# EAGLE board gd_hs (EAGLE 7.2.0)
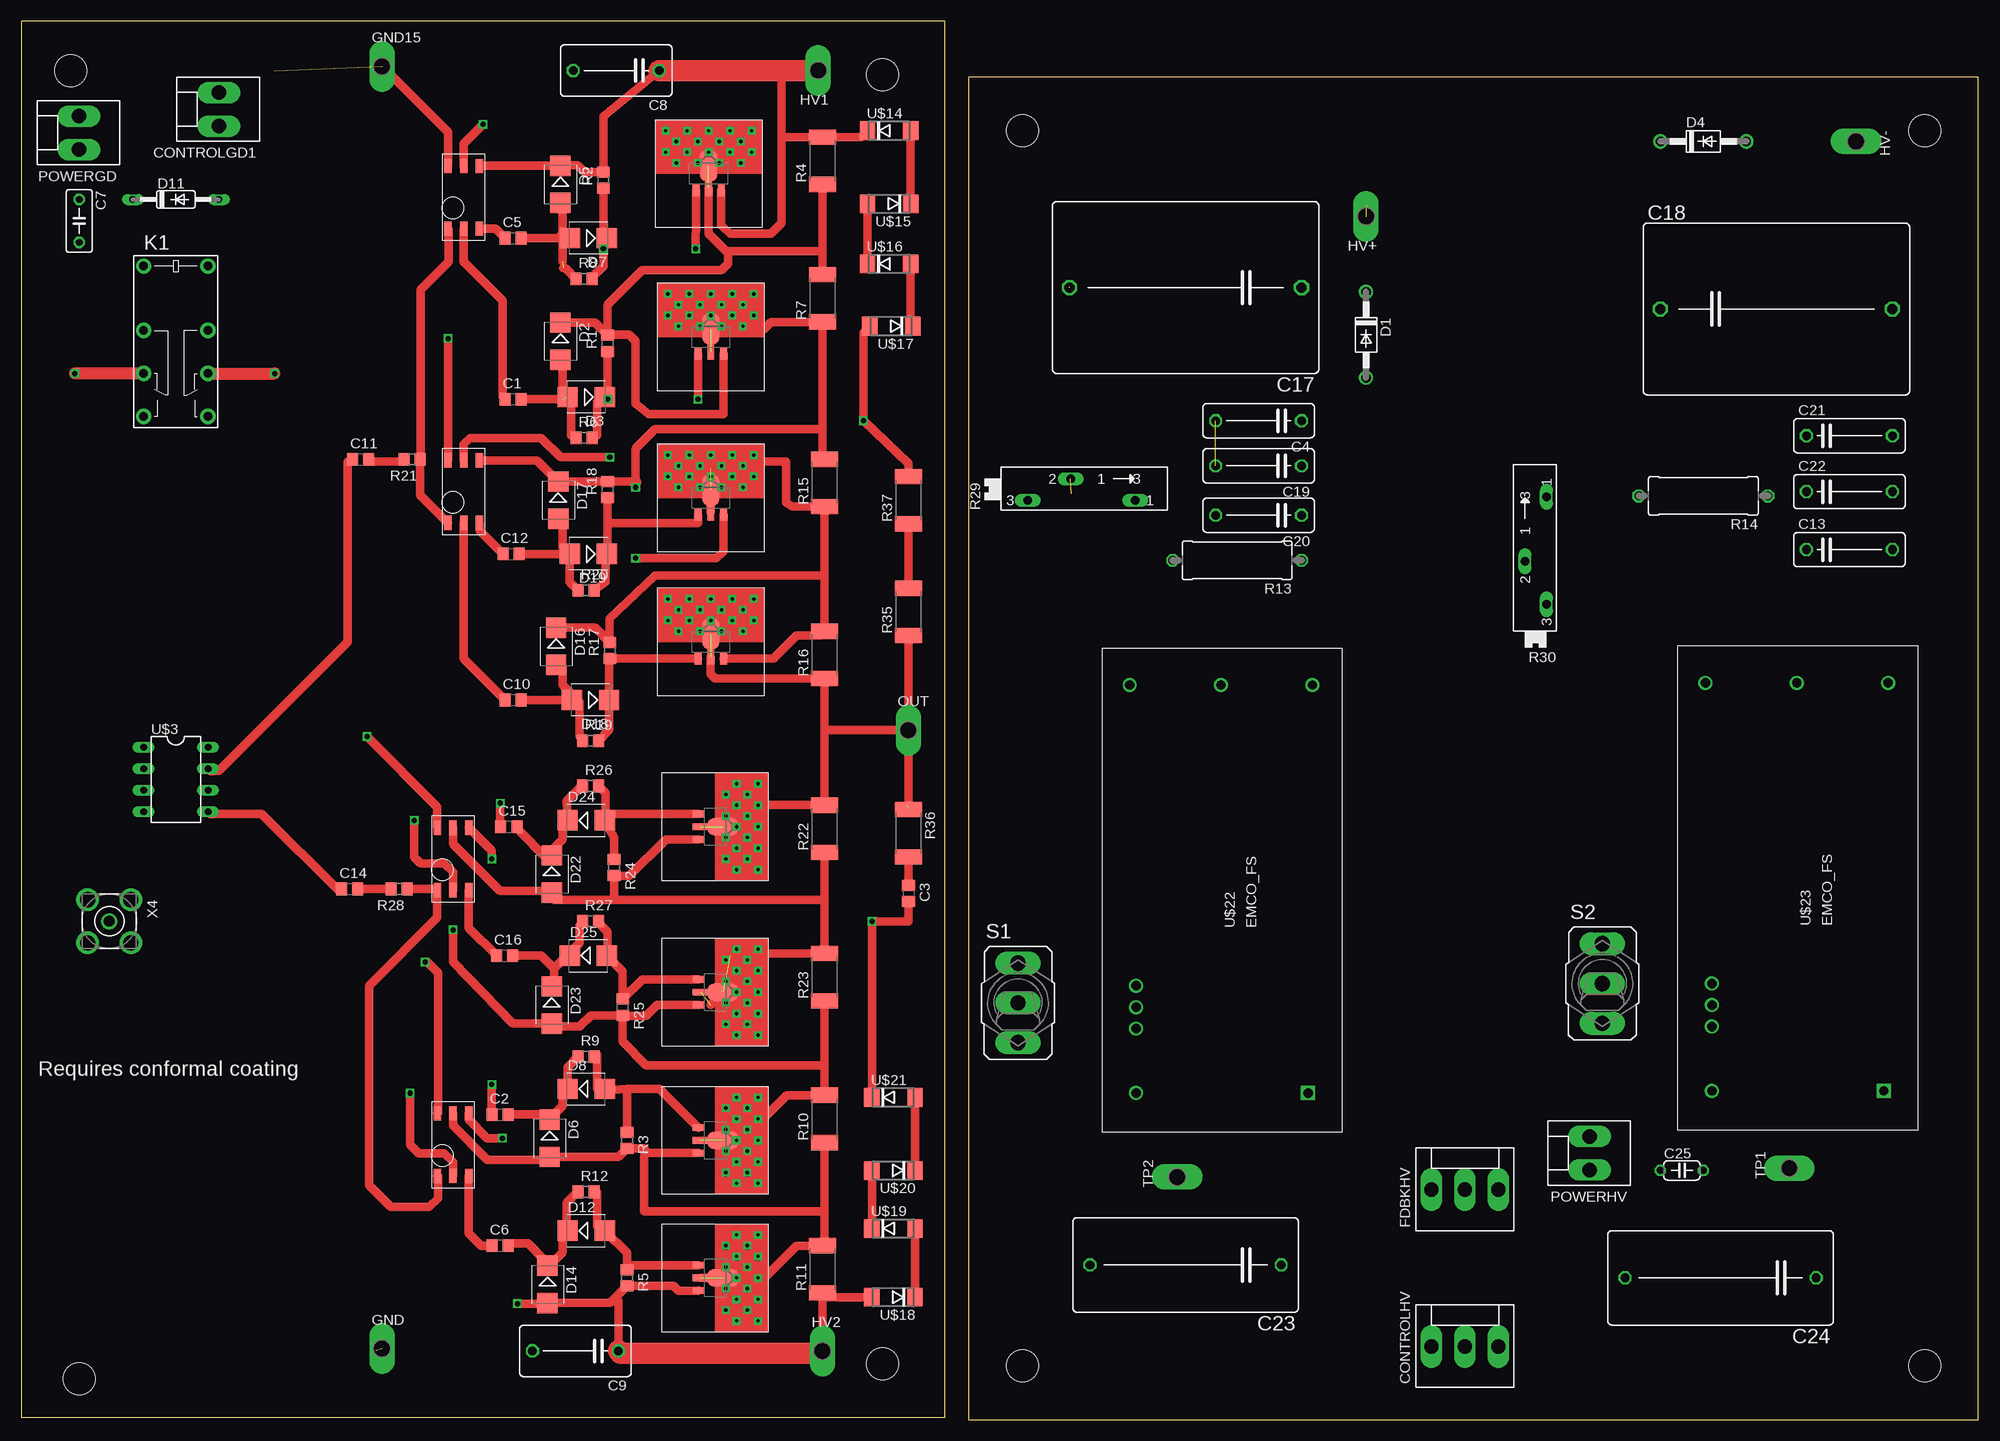
[diagram p0: board, top side]
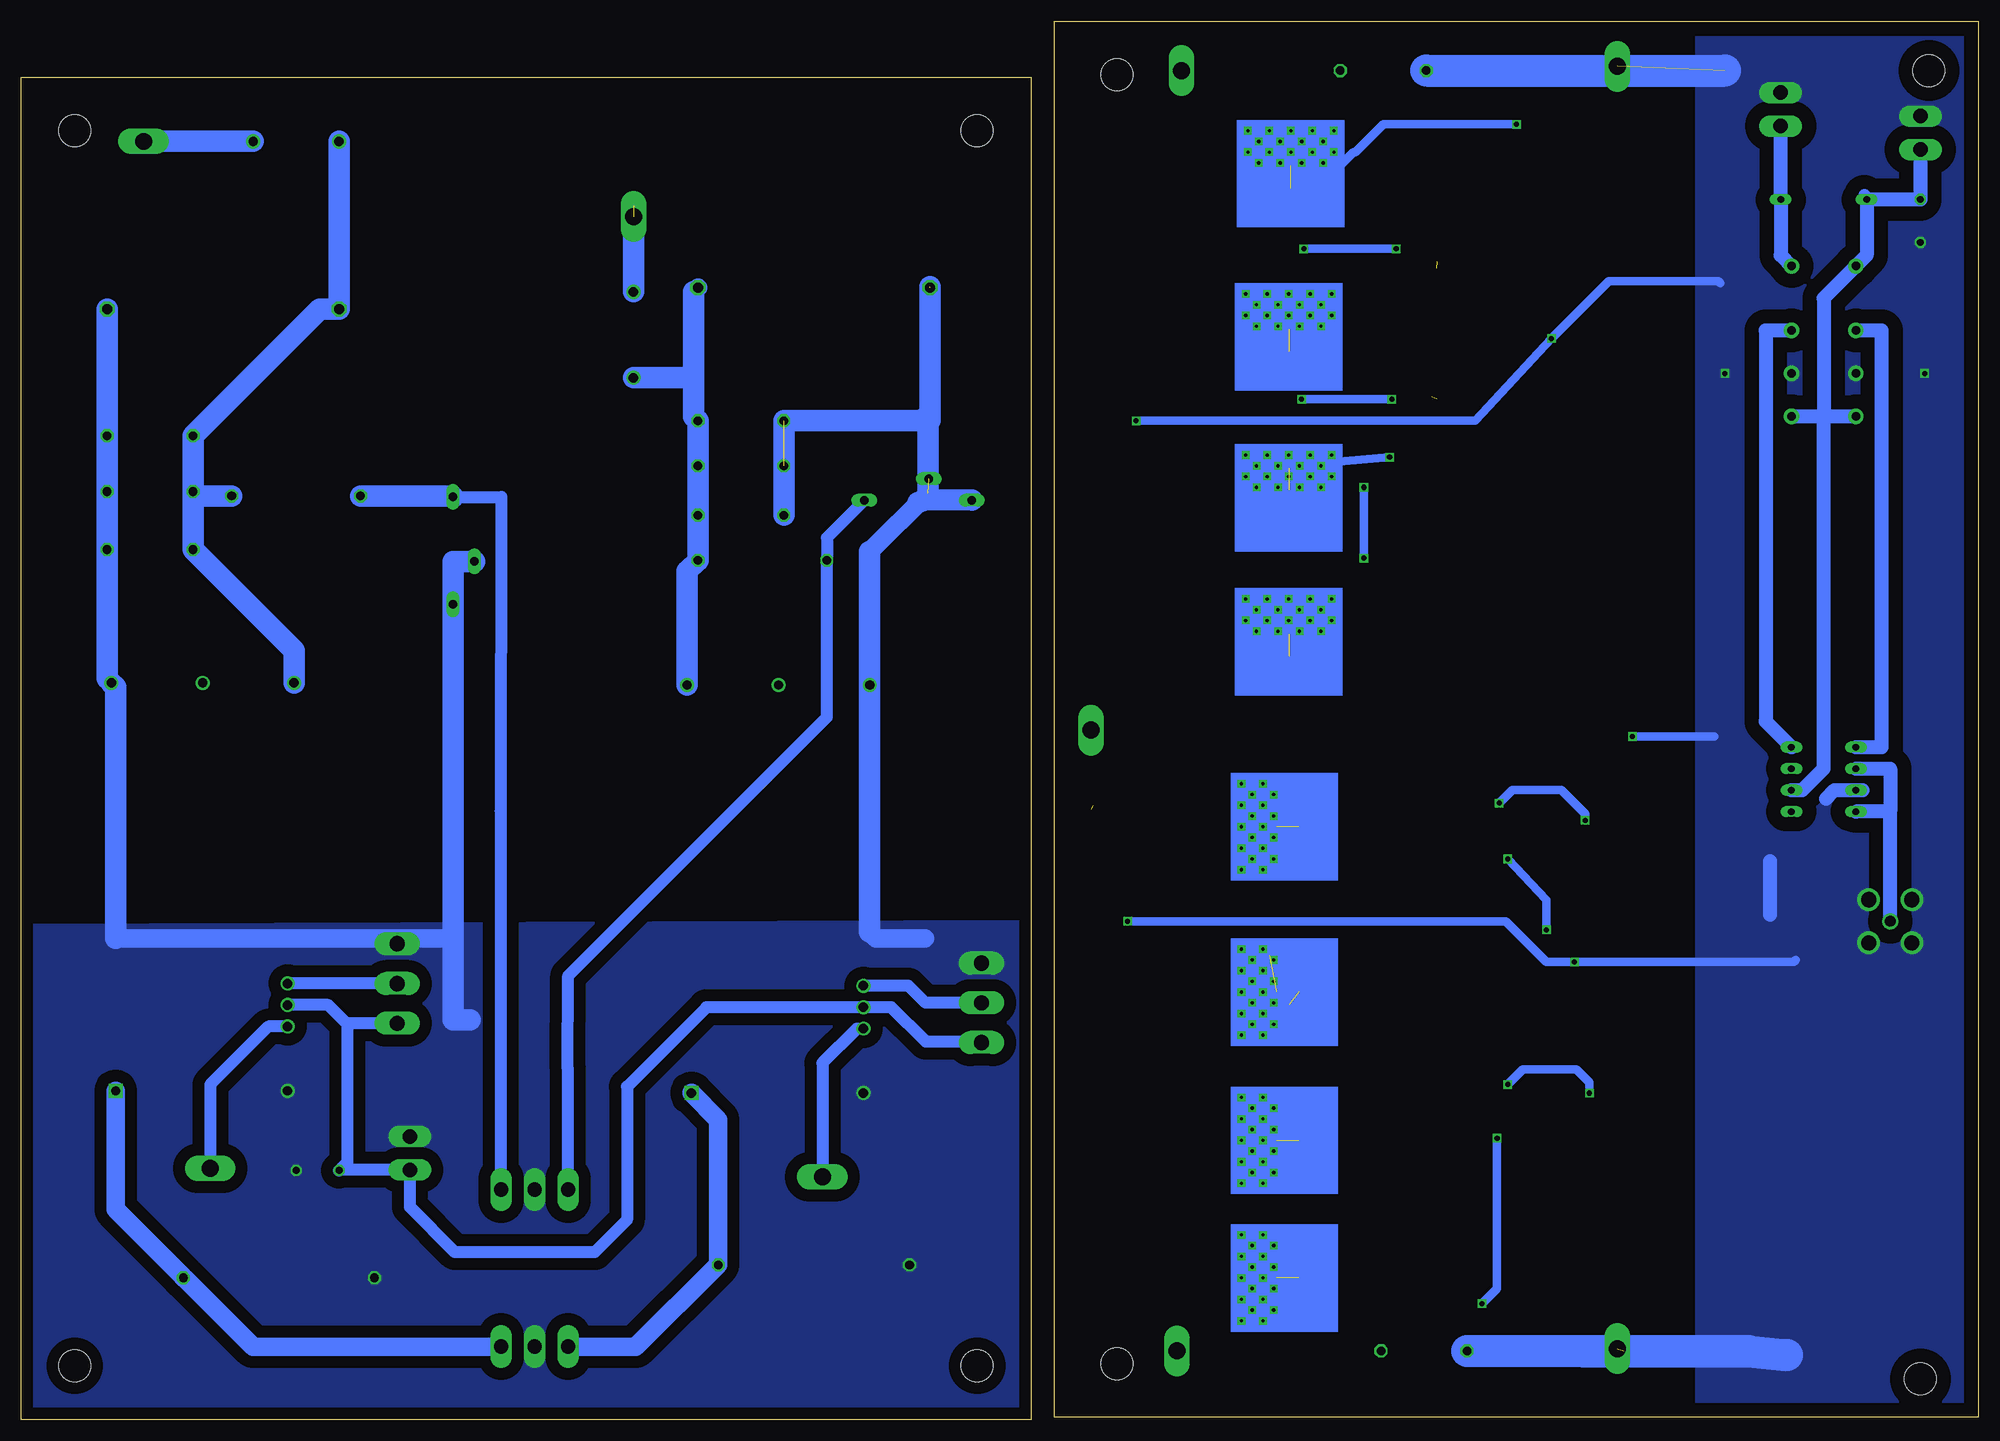
[diagram p1: board, bottom side, seen from below]

Size 231.39 x 165.35 mm. Coordinates in mm from the lower left corner, seen from the top.
Outline: 0,0.25 109.22,0.25 109.22,165.35 0,165.35 0,0.25
Outline: 231.39,0 231.39,158.75 112.01,158.75 112.01,0 231.39,0
Copper layers (1*16): Top 0.035mm / dielectric 1.5mm / Bottom 0.035mm
Design rules "default": minimum track width 10mil, minimum drill 24mil, track to track 8mil, track to pad 8mil, pad to pad 8mil, via to via 8mil, smd to smd 8mil, copper to edge 40mil, drill to drill 8mil, minimum pad ring 10mil, minimum via ring 8mil, stop-mask expansion 4mil, vias tented up to drill 0mil, thermal gap 10mil
Holes 3.8 mm at 101.85,159 101.85,6.6 6.86,4.83 5.84,159.51 225.04,152.4 118.36,152.4 225.04,6.35 118.36,6.35

## Footprints (pad centres in the part's own frame; a part is rotated, then mirrored left to right if it is on the bottom)
C0805 = smd 1.3 x 1.5: 1 -0.95,0; 2 0.95,0
C102-043X133 = drill 1.016 octagon: 1 -5.08,0; 2 5.08,0
C050-030X075 = drill 0.813 octagon: 1 -2.54,0; 2 2.54,0
C102-064X133 = drill 1.016 octagon: 1 -5.08,0; 2 5.08,0
C275-205X316 = drill 1.194 octagon: 1 -13.716,0; 2 13.716,0
C225-113X268 = drill 1.016 octagon: 1 -11.303,0; 2 11.303,0
C050-024X044 = drill 0.813 octagon: 1 -2.54,0; 2 2.54,0
KK-156-2 = drill 1.7 pad 2.184 long: 1 -1.98,0; 2 1.98,0
KK-156-3 = drill 1.7 pad 2.184 long: 1 -3.96,0; 2 0,0; 3 3.96,0
DO41-10 = drill 1.118: A 5.08,0; C -5.08,0
SMB = smd 2.4 x 2.4: A 2.2,0; C -2.2,0
DO35-10 = drill 0.813 long: A 5.08,0; C -5.08,0
P1-20Y = drill 2.007 pad 2.54 long: TP 0,0
G5V-2 = drill 1 pad 1.8: 1 -8.89,-3.81; 4 -1.27,-3.81; 6 3.81,-3.81; 8 8.89,-3.81; 9 8.89,3.81; 11 3.81,3.81; 13 -1.27,3.81; 16 -8.89,3.81
R0805 = smd 1.3 x 1.5: 1 -0.95,0; 2 0.95,0
R2512 = smd 1.8 x 3.2: 1 -2.8,0; 2 2.8,0
P0613/15 = drill 1.016 octagon: 1 -7.62,0; 2 7.62,0
SP19L = drill 1.016 long: A 5.715,-1.27; E -6.985,-1.27; S -1.905,1.27
M9040P = drill 1.803 long: 1 0,4.699; 2 0,0; 3 0,-4.699
SMD6 = smd 1.676 x 0.889: P$1 -3.696,1.854; P$2 -3.696,0; P$3 -3.696,-1.854; P$4 3.696,-1.854; P$5 3.696,0; P$6 3.696,1.854
SO89_HS = smd 0.8 x 1.4: B -1.499,-1.981; E 1.499,-1.981 | smd 0.8 x 1.9: C 0,-1.727 | smd 2.032 x 3.65: C@1 0,0.94 | drill 0.381 square: P$1 -3.81,3.81; P$2 -1.27,3.81; P$3 1.27,3.81; P$4 3.81,3.81; P$5 3.81,1.27; P$6 1.27,1.27; P$7 -1.27,1.27; P$8 -3.81,1.27; P$9 -2.54,5.08; P$10 -5.08,2.54; P$11 -2.54,2.54; P$12 -5.08,5.08; P$13 0,5.08; P$14 2.54,5.08; P$15 5.08,5.08; P$16 5.08,2.54; P$17 2.54,2.54; P$18 0,2.54
DIL08 = drill 0.813 long: 1 -3.81,-3.81; 2 -1.27,-3.81; 3 1.27,-3.81; 4 3.81,-3.81; 5 3.81,3.81; 6 1.27,3.81; 7 -1.27,3.81; 8 -3.81,3.81
DO214AA = smd 1.8 x 2.2: A 2.55,0; C -2.55,0
EMCO-FS = drill 1.1: +5 14.732,24.384; +OUT 52.832,3.556; -IN 4.572,24.384; -OUT 52.832,25.146; ALARM 12.192,24.384; CT 52.832,14.351; DISABLE 17.272,24.384 | drill 1.1 square: +IN 4.572,4.064
BU-SMA-V = drill 1.27: 1 0,0 | drill 1.778: 2 -2.55,2.55; 3 2.55,2.55; 4 2.55,-2.55; 5 -2.55,-2.55

## Placement (x,y rotation side)
C1  1u  [C0805]  58.17,120.65 0 top
C2  1u  [C0805]  56.64,36.07 0 top
C3  10n  [C0805]  104.9,62.23 270 top
C4  .01u  [C102-043X133]  146.3,118.11 180 top
C5  1u  [C0805]  58.17,139.7 0 top
C6  1u  [C0805]  56.64,20.57 0 top
C7  10n  [C050-030X075]  6.86,141.73 270 top
C8  10p  [C102-064X133]  70.36,159.51 180 top
C9  10p  [C102-064X133]  65.53,8.13 180 top
C10  1u  [C0805]  58.17,85.09 0 top
C11  1u  [C0805]  40.13,113.54 0 top
C12  1u  [C0805]  57.91,102.36 0 top
C13  .01u  [C102-043X133]  216.15,102.87 0 top
C14  1u  [C0805]  38.86,62.74 0 top
C15  1u  [C0805]  57.66,70.1 0 top
C16  1u  [C0805]  57.15,54.86 0 top
C17  1u  [C275-205X316]  137.67,133.86 180 top
C18  1u  [C275-205X316]  207.52,131.32 0 top
C19  1n  [C102-043X133]  146.3,112.78 180 top
C20  10p  [C102-043X133]  146.3,106.93 180 top
C21  1n  [C102-043X133]  216.15,116.33 0 top
C22  10p  [C102-043X133]  216.15,109.73 0 top
C23  .1u  [C225-113X268]  137.67,18.29 180 top
C24  .1u  [C225-113X268]  200.91,16.76 180 top
C25  10n  [C050-024X044]  196.34,29.46 0 top
CONTROLGD1  [KK-156-2]  23.37,154.94 90 top
CONTROLHV  [KK-156-3]  170.69,8.64 0 top
D1  1N4004  [DO41-10]  159,128.27 270 top
D2  1SMB5918BT3G  [SMB]  63.75,127.51 270 top
D3  [SMB]  66.8,120.9 180 top
D4  1N4004  [DO41-10]  198.88,151.13 0 top
D5  1SMB5918BT3G  [SMB]  63.75,146.05 270 top
D6  1SMB5918BT3G  [SMB]  62.48,33.27 270 top
D7  [SMB]  67.06,139.7 180 top
D8  [SMB]  66.8,39.12 0 top
D11  1N4148DO35-10  [DO35-10]  18.29,144.27 0 top
D12  [SMB]  66.8,22.35 0 top
D14  1SMB5918BT3G  [SMB]  62.23,16 270 top
D16  1SMB5918BT3G  [SMB]  63.25,91.44 270 top
D17  1SMB5918BT3G  [SMB]  63.5,108.71 270 top
D18  [SMB]  67.31,85.09 180 top
D19  [SMB]  67.06,102.36 180 top
D22  1SMB5918BT3G  [SMB]  62.74,64.52 270 top
D23  1SMB5918BT3G  [SMB]  62.74,49.02 270 top
D24  [SMB]  66.8,70.87 0 top
D25  [SMB]  67.06,54.86 0 top
FDBKHV  [KK-156-3]  170.69,27.18 0 top
GND  TPPAD1-20Y  [P1-20Y]  42.67,8.38 0 top
GND15  TPPAD1-20Y  [P1-20Y]  42.67,160.02 0 top
HV1  TPPAD1-20Y  [P1-20Y]  94.23,159.51 180 top
HV2  TPPAD1-20Y  [P1-20Y]  94.74,8.13 0 top
HV+  TPPAD1-20Y  [P1-20Y]  159,142.24 180 top
HV-  TPPAD1-20Y  [P1-20Y]  216.92,151.13 270 top
K1  G5V-2  [G5V-2]  18.29,127.51 270 top
OUT  TPPAD1-20Y  [P1-20Y]  104.9,81.53 0 top
POWERGD  [KK-156-2]  6.86,152.15 90 top
POWERHV  [KK-156-2]  185.42,31.5 90 top
R1  100k  [R0805]  69.34,127.25 90 top
R2  100k  [R0805]  68.83,146.56 90 top
R3  100k  [R0805]  71.63,33.02 270 top
R4  10M  [R2512]  94.74,148.84 90 top
R5  100k  [R0805]  71.63,16.76 270 top
R6  10  [R0805]  66.55,116.08 0 top
R7  10M  [R2512]  94.74,132.59 90 top
R8  10  [R0805]  66.55,134.87 0 top
R9  10  [R0805]  66.8,42.93 0 top
R10  10M  [R2512]  95,35.56 90 top
R11  10M  [R2512]  94.74,17.78 90 top
R12  10  [R0805]  66.8,26.92 0 top
R13  2M  [P0613/15]  143.76,101.6 180 top
R14  2M  [P0613/15]  198.88,109.22 180 top
R15  10M  [R2512]  95,110.74 90 top
R16  10M  [R2512]  95,90.42 90 top
R17  100k  [R0805]  69.6,90.93 90 top
R18  100k  [R0805]  69.34,109.98 90 top
R19  10  [R0805]  67.31,80.26 0 top
R20  10  [R0805]  66.8,98.04 0 top
R21  10  [R0805]  46.23,113.54 180 top
R22  10M  [R2512]  95,69.85 90 top
R23  10M  [R2512]  95,52.32 90 top
R24  100k  [R0805]  70.1,65.28 270 top
R25  100k  [R0805]  71.12,48.77 270 top
R26  10  [R0805]  67.31,74.93 0 top
R27  10  [R0805]  67.31,58.93 0 top
R28  10  [R0805]  44.7,62.74 180 top
R29  [SP19L]  125.98,109.98 0 top
R30  [SP19L]  179.07,103.38 90 top
R35  10M  [R2512]  104.9,95.5 90 top
R36  10M  [R2512]  104.9,69.34 270 top
R37  10M  [R2512]  104.9,108.71 90 top
S1  [M9040P]  117.86,49.28 0 top
S2  [M9040P]  186.94,51.56 0 top
TP1  PTR1PAD1-20Y  [P1-20Y]  209.04,29.72 90 top
TP2  PTR1PAD1-20Y  [P1-20Y]  136.65,28.7 90 top
U$1  DA-2320SMD6  [SMD6]  52.32,144.53 90 top
U$2  VN2450HS  [SO89_HS]  82.04,33.02 270 top
U$3  UCC27425  [DIL08]  18.29,75.69 270 top
U$4  VP2450HS  [SO89_HS]  81.28,147.32 0 top
U$5  VP2450HS  [SO89_HS]  81.53,128.02 0 top
U$6  VN2450HS  [SO89_HS]  82.04,16.76 270 top
U$7  DA-2320SMD6  [SMD6]  51.05,32.51 90 top
U$8  DA-2320SMD6  [SMD6]  52.32,109.73 90 top
U$9  VP2450HS  [SO89_HS]  81.53,108.97 0 top
U$10  VP2450HS  [SO89_HS]  81.53,91.95 0 top
U$11  VN2450HS  [SO89_HS]  82.04,70.1 270 top
U$12  VN2450HS  [SO89_HS]  82.04,50.55 270 top
U$13  DA-2320SMD6  [SMD6]  51.05,66.29 90 top
U$14  SMBJ170D-M3/H  [DO214AA]  102.62,152.4 0 top
U$15  SMBJ170D-M3/H  [DO214AA]  102.62,143.76 180 top
U$16  SMBJ170D-M3/H  [DO214AA]  102.62,136.65 0 top
U$17  SMBJ170D-M3/H  [DO214AA]  102.87,129.29 180 top
U$18  SMBJ170D-M3/H  [DO214AA]  103.12,14.48 180 top
U$19  SMBJ170D-M3/H  [DO214AA]  103.12,22.61 0 top
U$20  SMBJ170D-M3/H  [DO214AA]  103.12,29.46 180 top
U$21  SMBJ170D-M3/H  [DO214AA]  103.12,38.1 0 top
U$22  EMCO-FS10  [EMCO-FS]  156.21,34.04 90 top
U$23  EMCO-FS10  [EMCO-FS]  224.28,34.29 90 top
X4  BU-SMA-V  [BU-SMA-V]  10.41,58.93 270 top

## Library data of the parts
C1-C3 C5 C6 C8-C12 C14-C16 R13 R14 = resistor
C4 C7 C13 C17-C25 R1-R12 R15-R28 R35-R37 = rcl
CONTROLGD1 CONTROLHV FDBKHV POWERGD POWERHV = con-molex; OC_FARNELL: unknown; OC_NEWARK: unknown
D1-D8 D11 D12 D14 D16-D19 D22-D25 U$14-U$21 = diode
GND GND15 HV1 HV2 HV+ HV- OUT TP1 TP2 = testpad
K1 = relay; MPN: G5V-2 5DC; OC_FARNELL: 9949488; OC_NEWARK: 78K5703
R29 R30 = pot
S1 S2 = switch
U$1 U$7 U$8 U$13 = trafo
U$2 U$4-U$6 U$9-U$12 = transistor-fet
U$3 = texas
U$22 U$23 = dc-dc-converter
X4 = con-coax; OC_FARNELL: unknown; OC_NEWARK: unknown

## Nets
+5V: C25.1 POWERHV.1 S1.3 S2.3 U$22.+5 U$23.+5
+15V: C7.1 D11.C K1.1 K1.8 K1.9 POWERGD.1 U$3.6
ENSW: CONTROLGD1.1 D11.A K1.16
GND: C3.2 C7.2 C8.2 C9.2 CONTROLGD1.2 GND15.TP GND.TP K1.6 K1.11 POWERGD.2 R37.2 U$1.P$6 U$3.3 U$7.P$6 U$8.P$6 U$13.P$6 U$17.A U$21.C X4.2 X4.3 X4.4 X4.5
GND1: C4.2 C13.2 C17.2 C18.2 C19.2 C20.2 C21.2 C22.2 C23.2 C24.2 C25.2 CONTROLHV.2 FDBKHV.2 POWERHV.2 R29.E R29.S R30.E R30.S S1.1 S2.1 U$22.-IN U$22.-OUT U$23.+OUT U$23.-IN
N$1: U$3.2 U$3.4 X4.1
N$2: C11.1 U$3.7
N$3: D16.C R15.1 R16.2 R17.2 U$8.P$5 U$9.C U$9.C@1 U$10.E
N$4: C14.1 U$3.5
N$5: C1.1 U$1.P$2
N$6: C8.1 D5.C HV1.TP R2.2 R4.2 U$1.P$4 U$4.E U$14.C
N$7: C5.1 U$1.P$3
N$8: D3.C R1.1 R6.2 U$5.B
N$9: D2.C R1.2 R4.1 R7.2 U$1.P$5 U$4.C U$4.C@1 U$5.E
N$10: C1.2 D2.A D3.A R6.1
N$11: D12.A R5.1 R12.2 U$6.B
N$12: D7.C R2.1 R8.2 U$4.B
N$13: C4.1 C17.1 C19.1 C20.1 D1.A R13.1 U$22.+OUT
N$14: K1.4 U$3.1
N$15: K1.13 U$3.8
N$16: C5.2 D5.A D7.A R8.1
N$17: C13.1 C18.1 C21.1 C22.1 D4.C R14.1 U$23.-OUT
N$18: FDBKHV.1 R13.2 R29.A
N$19: FDBKHV.3 R14.2 R30.A
N$20: D23.A R10.2 R23.1 R25.2 U$2.C U$2.C@1 U$12.E U$13.P$4
N$21: D6.A R3.2 R10.1 R11.2 U$2.E U$6.C U$6.C@1 U$7.P$5
N$22: C2.1 U$7.P$2
N$23: C6.1 U$7.P$3
N$24: D1.C HV+.TP
N$25: C2.2 D6.C D8.C R9.1
N$26: OUT.TP R16.1 R22.2 R35.1 R36.1 U$10.C U$10.C@1 U$11.C U$11.C@1
N$27: C6.2 D12.C D14.C R12.1
N$28: C10.1 U$8.P$2
N$29: C12.1 U$8.P$3
N$30: C12.2 D17.A D19.A R20.1
N$31: C9.1 D14.A HV2.TP R5.2 R11.1 U$6.E U$7.P$4 U$18.A
N$32: D4.A HV-.TP
N$33: C23.1 CONTROLHV.1 U$22.+IN
N$34: D18.C R17.1 R19.2 U$10.B
N$35: C10.2 D16.A D18.A R19.1
N$36: D19.C R18.1 R20.2 U$9.B
N$37: R21.1 U$1.P$1 U$8.P$1
N$38: C11.2 R21.2
N$39: C3.1 R36.2
N$40: C15.1 U$13.P$2
N$41: C16.1 U$13.P$3
N$42: C15.2 D22.C D24.C R26.1
N$43: C16.2 D23.C D25.C R27.1
N$44: R35.2 R37.1
N$45: U$14.A U$15.C
N$46: D22.A R22.1 R23.2 R24.2 U$11.E U$12.C U$12.C@1 U$13.P$5
N$47: D25.A R25.1 R27.2 U$12.B
N$48: R28.1 U$7.P$1 U$13.P$1
N$49: C14.2 R28.2
N$50: D24.A R24.1 R26.2 U$11.B
N$51: C24.1 CONTROLHV.3 U$23.+IN
N$52: U$15.A U$16.C
N$53: U$16.A U$17.C
N$54: U$18.C U$19.A
N$55: U$19.C U$20.A
N$56: U$20.C U$21.A
N$57: D17.C R7.1 R15.2 R18.2 U$5.C U$5.C@1 U$8.P$4 U$9.E
N$58: TP1.TP U$23.ALARM
N$59: TP2.TP U$22.ALARM
N$60: S1.2 U$22.DISABLE
N$61: S2.2 U$23.DISABLE
N$251: D8.A R3.1 R9.2 U$2.B

## Tracks (layer width: path | path; a pad name or v marks a point on that pad's centre or on a via)
+5V
  Bottom 1.422: 131.78,48.72 U$22.+5 | U$22.+5 128.52,48.77 124.46,44.7 117.98,44.7 S1.3 | U$22.+5 150.37,48.77 159.77,39.37 159.77,23.62 163.58,19.81 180.09,19.81 185.42,25.15 POWERHV.1 193.75,29.52 C25.1 192.84,30.43 192.84,46.79 192.91,46.86 | 192.91,46.86 195.07,49.02 U$23.+5 | S2.3 192.91,46.86
+15V
  Bottom 1.016: 13.21,144.78 D11.C
  Bottom 1.422: 13.46,144.27 13.46,144.78
  Bottom 1.676: D11.C 13.21,137.67 K1.1 18.29,132.59 18.29,118.62 | 18.29,118.62 18.29,76.96 20.83,74.42 U$3.6 | 18.29,118.62 K1.9 | K1.8 18.29,118.62 | POWERGD.1 C7.1 D11.C | D11.C 13.46,144.27
ENSW
  Bottom 1.676: CONTROLGD1.1 D11.A 23.37,137.67 K1.16
GND  (via drill 0.6)  (2 unrouted)
  Top 1.016: v47.75,54.1 48.01,54.1 49.28,52.83 49.28,36.28 U$7.P$6 | U$1.P$6 50.47,152.22 GND15.TP | U$8.P$6 v50.47,127.84 | U$13.P$6 49.2,72.47 v40.89,80.77 | 104.65,111.25 R37.2 104.9,113.03 v99.57,118.11 99.57,128.53 U$17.A | U$21.C 100.57,49.03 v100.58,58.93 104.9,58.93 C3.2
  Top 1.422: K1.6 v6.35,123.7 | K1.11 v29.97,123.7
  Bottom 1.016: 15.24,74.42 15.24,74.68 U$3.3 | 21.59,54.36 21.84,54.1 v47.75,54.1 51.05,54.1 55.88,58.93 v100.58,58.93 | 30.48,134.37 30.73,134.62 43.69,134.62 v50.47,127.84 59.44,118.11 v99.57,118.11 | v40.89,80.77 31.24,80.77
  Bottom 1.422: 41.66,8.38 41.91,8.13
  Bottom 1.676: 24.64,66.04 24.64,59.69 | 18.03,73.41 17.02,74.42 15.24,74.42 U$3.3 13.72,74.42
  Bottom 3.81: 46.69,8.08 27.18,8.1 | 27.18,8.1 22.61,7.62 | C8.2 29.97,159.51 | C9.2 41.91,8.13 27.18,8.13 27.18,8.1
  pour Bottom (isolate 1.676, no thermals): 0,163.58 33.27,163.58 33.27,1.02 0,1.02
GND1  (3 unrouted)
  Bottom 2.184: 131.06,57.66 130.3,56.9 124.51,56.9 | 131.06,102.62 124.21,109.47 | 221.23,87.63 U$23.+OUT | 180.34,101.47 180.34,57.15 180.59,56.9 220.22,56.9
  Bottom 2.54: 124.46,118.11 C4.2 C20.2 | 123.95,133.98 123.95,118.11 124.21,118.11 | 125.35,108.46 124.44,108.76 | 124.44,108.76 R29.E | 124.21,118.11 124.46,118.11 | 124.46,118.11 124.71,118.36 124.46,118.36 124.21,118.11 | 124.21,118.11 124.21,109.47 124.21,109.29 124.44,108.76 | C18.2 C21.2 C22.2 C13.2 221.23,87.63 | R30.S 180.34,101.47 R30.E 180.34,47.24 178.31,47.24 | 131.06,57.66 U$22.-OUT 131.06,102.62 | 220.22,56.9 220.22,86.61 U$23.+OUT
  pour Bottom (isolate 1.422, no thermals): 112.01,0 112.27,58.93 231.14,58.42 231.39,0.25
N$1
  Bottom 1.676: X4.1 10.41,71.88 | U$3.2 10.41,76.96 10.41,71.88 | 10.41,71.88 U$3.4
N$2
  Top 1.016: U$3.7 22.35,76.71 23.37,76.71 38.61,91.95 38.61,113.28 C11.1
N$3  (via drill 0.6)  (2 unrouted)
  Top 1.016: U$10.E 88.95,89.97 91.69,92.71 94.48,92.71 R16.2 95,99.82 | U$9.C 81.53,112.52 83.31,113.54 87.12,113.28 90.42,113.28 90.42,108.46 91.19,107.95 R15.1 95,99.82 | U$8.P$5 52.32,115.32 53.09,116.08 61.47,116.08 63.75,113.79 v69.6,113.79 | D16.C 67.84,93.64 R17.2 69.6,94.74 74.93,99.82 95,99.82
  Bottom 1.016: v69.6,113.79 81.03,112.78 81.53,112.27
N$4
  Top 1.016: U$3.5 22.35,71.63 28.45,71.63 37.59,62.48 C14.1
N$5
  Top 1.016: U$1.P$2 52.32,136.91 56.9,132.33 56.9,120.97 C1.1
N$6
  Top 1.016: C8.1 68.83,154.11 R2.2 66.61,147.51 65.79,148.34 63.84,148.34 D5.C 54.21,148.25 U$1.P$4 | U$4.E 82.78,141.25 83.82,140.21 88.65,140.21 89.92,141.48 89.92,151.89 | 89.92,151.89 89.92,159.26 89.66,159.51 | 89.92,151.89 90.16,151.64 R4.2 99.31,151.64 U$14.C
  Top 2.54: C8.1 89.66,159.51 HV1.TP
N$7
  Top 1.016: U$1.P$3 56.09,140.83 C5.1
N$8  (via drill 0.6)
  Top 1.016: R6.2 68.07,116.33 68.07,120.4 D3.C 69.34,120.9 v69.34,120.65 R1.1 | U$5.B 80.03,123.47 v80.01,120.65
  Bottom 1.016: v80.01,120.65 v69.34,120.65
N$9  (via drill 0.6)  (2 unrouted)
  Top 1.016: 83.03,122.52 U$5.E 83.03,118.9 83.06,118.87 74.17,118.87 72.64,120.14 72.64,127.51 71.88,128.27 69.41,128.27 R1.2 | U$1.P$5 52.32,150.88 v54.61,153.16 | R4.1 94.74,138.18 | 94.74,138.18 R7.2 | U$4.C 81.28,140.21 83.31,138.18 | 83.31,138.18 94.74,138.18 | D2.C 67.84,129.71 R1.2 | R1.2 69.34,131.83 73.41,135.89 82.8,135.89 83.57,136.65 83.57,137.92 83.31,138.18
  Bottom 1.016: v54.61,153.16 70.36,153.16 73.66,149.86 73.91,149.86 75.44,148.34 81.2,148.34 U$4.C@1
N$10  (1 unrouted)
  Top 1.016: R6.1 65.02,116.33 65.02,120.4 D3.A 64.01,121.41 64.01,124.46 D2.A | C1.2 64.01,120.65
N$11
  Top 1.016: R12.2 68.07,26.92 68.07,22.86 D12.A 71.63,19.73 R5.1 72.18,18.26 U$6.B
N$12  (via drill 0.6)
  Top 1.016: v68.83,138.43 68.83,139.95 69.85,139.7 D7.C | v68.83,138.43 R2.1 | U$4.B 79.78,142.26 v79.76,138.43 | R8.2 67.5,135.06 68.83,136.4 v68.83,138.43
  Bottom 1.016: v79.76,138.43 v68.83,138.43
N$13
  Bottom 2.184: 151.89,118.62 C4.1 | 151.89,133.35 C17.1
  Bottom 2.54: D1.A 151.89,123.19 | U$22.+OUT 152.65,100.33 R13.1 C20.1 C19.1 C4.1 | 151.89,123.19 151.89,118.62 | 151.89,123.19 151.89,133.35
N$14
  Bottom 1.676: 13.97,79.5 U$3.1 11.43,79.5 11.43,128.78 K1.4
N$15
  Bottom 1.676: K1.13 25.15,128.78 25.15,82.55 U$3.8
N$16  (1 unrouted)
  Top 1.016: 64.01,140.21 64.01,143.76 D5.A | 64.01,140.21 64.01,139.7 | C5.2 63.5,139.7 64.01,140.21 | D7.A 64.01,139.7 | 64.01,139.7 64.01,136.91 | 64.09,136.12 64.35,136.12 R8.1
N$17
  Bottom 2.54: D4.C C18.1 196.09,131.32 C21.1 C22.1 211.07,109.22 | 211.07,109.22 C13.1 199.14,90.93 U$23.-OUT | R14.1 211.07,109.22
N$18
  Bottom 1.422: R29.A 136.14,104.27 R13.2 136.14,83.06 166.73,52.47 166.78,41.5 166.78,27.23 FDBKHV.1
N$19
  Bottom 1.422: R30.A 174.62,109.09 174.7,72.14 | 174.7,72.14 174.7,71.83 | FDBKHV.3 174.65,71.83 174.7,72.14
  Bottom 2.54: R14.2 180.47,109.22 R30.A
N$20  (via drill 0.6)  (1 unrouted)
  Top 1.016: R25.2 71.19,47.75 73.91,47.75 75.21,49.05 U$12.E | R25.2 67.38,47.82 66.04,46.48 63.08,46.48 D23.A 58.08,46.82 51.05,54.1 v51.05,57.91 | v55.63,66.29 55.63,67.27 U$13.P$4 | R25.2 71.12,44.7 73.91,41.91 94.74,41.91 95,42.16 R23.1 R10.2 90.48,38.36 84.55,32.42 | U$2.C@1 84.55,32.42 | 84.55,32.42 87.45,31.32
  Bottom 1.016: v51.05,57.91 51.05,61.47 v55.63,66.29
N$21  (1 unrouted)
  Top 1.016: U$7.P$5 51.05,34.8 55.12,30.73 62.14,30.73 D6.A 70.63,31.07 R3.2 73.73,32.07 73.7,31.52 | R10.1 95,24.64 | 95,24.64 95,20.83 R11.2 91.69,20.57 87.88,16.76 U$6.C | 95,24.64 73.66,24.64 73.66,30.87 73.7,31.52 | U$2.E 73.7,31.52
N$22  (via drill 0.6)
  Top 1.016: 55.63,36 C2.1 55.63,36.13 v55.63,39.62 | U$7.P$2 51.05,30.48 50.04,31.5 46.99,31.5 45.97,32.51 v45.97,38.61
  Bottom 1.016: v45.97,38.61 45.97,39.88 47.5,41.4 53.85,41.4 v55.63,39.62
N$23
  Top 1.016: 55.88,20.76 C6.1 54.36,20.57 52.91,22.02 U$7.P$3
N$24  (1 unrouted)
  Bottom 2.54: D1.C 159,143.51
N$25
  Top 1.016: C2.2 61.98,36.07 D6.C 62.99,36.07 64.01,37.08 64.01,39.12 D8.C 64.6,41.68 R9.1
N$26  (3 unrouted)
  Top 1.016: 81.53,92.96 U$10.C@1 | R22.2 95,81.53 | 95,81.53 R16.1 | R16.1 | R22.2 | 95,81.53 OUT.TP | U$10.C 81.53,88.14 82.04,87.63 90.18,87.63 R16.1 | R35.1 OUT.TP | OUT.TP 104.9,72.9 104.65,72.64 | R22.2 82.98,72.65 U$11.C@1
N$27
  Top 1.016: C6.2 57.91,20.83 59.94,20.83 61.98,18.8 D14.C 62.99,18.8 64.01,19.81 64.01,21.84 D12.C 64.52,22.44 64.52,25.65 65.79,26.92 R12.1
N$28
  Top 1.016: U$8.P$2 52.32,89.98 C10.1
N$29
  Top 1.016: U$8.P$3 54.18,105.15 C12.1
N$30
  Top 1.016: 64.39,102.78 64.01,103.12 64.01,106.17 D17.A | 64.39,102.78 D19.A 64.86,99.04 R20.1 | C12.2 63.97,102.36 64.39,102.78
N$31  (via drill 0.6)
  Top 1.016: U$7.P$4 52.91,35.48 55.12,33.27 v56.9,33.27 | v58.67,13.72 62.14,13.72 D14.A 69.62,13.8 70.2,14.38 | 70.2,14.38 R5.2 77.15,15.81 77.72,15.24 80.04,15.24 U$6.E | U$18.A 95.24,14.48 R11.1 | R11.1 HV2.TP | C9.1 70.61,13.97 70.2,14.38 | R11.1 94.74,7.87
  Top 2.54: 94.74,7.87 70.87,7.87 C9.1
  Bottom 1.016: v56.9,33.27 56.9,15.49 v58.67,13.72
N$32
  Bottom 2.54: HV-.TP D4.A
N$33
  Bottom 2.184: CONTROLHV.1 158.75,8.64 C23.1 148.97,35.43 U$22.+IN
N$34
  Top 1.016: U$10.B 80.02,89.98 R17.1 69.51,88.63 D18.C 69.51,81.51 R19.2
N$35
  Top 1.016: R19.1 66.04,80.77 66.04,84.84 D18.A | D16.A 64.01,88.9 64.01,86.87 65.02,85.85 D18.A | C10.2 D18.A
N$36
  Top 1.016: R20.2 69.09,99.06 69.09,102.11 D19.C 69.34,103.46 69.34,106.68 | R18.1 69.34,106.68 | U$9.B 80.02,105.98 69.41,105.98 69.34,106.68
N$37
  Top 1.016: U$8.P$1 47.18,109.32 R21.1 47.24,113.54 47.24,133.6 50.55,136.91 50.55,140.75 U$1.P$1
N$38
  Top 1.016: C11.2 41.66,113.28 44.7,113.28 R21.2
N$39
  Top 1.016: R36.2 C3.1
N$40  (via drill 0.6)
  Top 1.016: U$13.P$2 51.05,64.77 50.04,65.79 47.24,65.79 46.48,66.55 v46.48,70.87 | v56.64,72.9 56.64,70.17 C15.1
  Bottom 1.016: v46.48,70.87 46.48,71.63 49.28,74.42 55.12,74.42 v56.64,72.9
N$41
  Top 1.016: U$13.P$3 52.91,58.16 C16.1
N$42
  Top 1.016: R26.1 66.04,74.68 64.52,73.15 D24.C 64.01,70.61 64.01,68.58 62.99,67.56 D22.C 61.98,66.55 58.93,69.6 C15.2
N$43
  Top 1.016: R27.1 66.04,58.42 66.04,56.39 65.02,55.37 D25.C 64.01,54.36 62.99,53.34 | 62.99,53.34 62.99,51.31 D23.C | C16.2 61.47,54.86 62.99,53.34
N$44
  Top 1.016: R35.2 R37.1
N$45
  Top 1.016: U$14.A U$15.C
N$46  (2 unrouted)
  Top 1.016: 95,61.47 70.1,61.47 | 70.1,61.47 62.99,61.47 D22.A 62.57,62.48 56.64,62.48 51.05,68.07 U$13.P$5 | 81.53,49.02 U$12.C@1 | 70.17,63.75 R24.2 | R24.2 70.1,61.47 | 95,61.47 R23.2 84.08,55.12 83.82,54.86 | 95,61.47 R22.1 | R24.2 70.17,64.26 71.88,64.26 76.22,68.61 U$11.E
N$47
  Top 1.016: R27.2 68.26,58.74 69.34,57.66 69.34,54.95 D25.A 71.12,53 R25.1 73.45,52.04 U$12.B
N$48
  Top 1.016: R28.1 49.06,62.74 U$13.P$1 49.2,59.36 41.15,51.31 41.15,27.69 43.69,25.15 48.26,25.15 49.28,26.16 49.28,28.74 U$7.P$1
N$49
  Top 1.016: C14.2 R28.2
N$50
  Top 1.016: R24.1 70.1,68.83 69.09,70.61 | 69.09,70.61 D24.A | 69.09,70.61 69.09,71.6 | R26.2 69.09,74.1 69.09,71.63 69.09,71.6 | U$11.B 69.09,71.6
N$51
  Bottom 2.184: CONTROLHV.3 203.96,8.64 212.09,16.76 C24.1 212.22,16.89 220.22,24.89 U$23.+IN
N$52
  Top 1.016: U$15.A U$16.C
N$53
  Top 1.016: U$16.A 105.17,129.54 U$17.C
N$54
  Top 1.016: U$18.C U$19.A
N$55
  Top 1.016: U$19.C U$20.A
N$56
  Top 1.016: U$20.C U$21.A
N$57  (via drill 0.6)  (1 unrouted)
  Top 1.016: U$9.E 83.03,102.66 82.23,101.85 v72.64,101.85 | U$5.C@1 87.81,128.96 88.65,129.79 R7.1 94.74,117.09 | 94.74,117.09 94.74,113.8 | 94.74,113.8 R15.2 | U$8.P$4 60.99,113.42 D17.C 69.32,110.91 R18.2 72.83,110.93 v72.64,110.24 72.64,114.81 74.93,117.09 94.74,117.09 | 94.74,113.8 94.74,117.09
  Bottom 1.016: v72.64,110.24 v72.64,101.85
N$58
  Bottom 1.422: U$23.ALARM 202.18,46.48 209.04,39.62 TP1.TP
N$59
  Bottom 1.422: U$22.ALARM 132.59,46.23 136.65,42.16 TP2.TP
N$60
  Bottom 1.422: S1.2 124.46,49.28 126.49,51.31 U$22.DISABLE
N$61
  Bottom 1.422: S2.2 U$23.DISABLE
N$251
  Top 1.016: R9.2 68.07,43.18 68.07,39.12 D8.A 69,38.95 71.63,39.12 | R3.1 71.63,39.12 | 71.63,39.12 75.46,39.12 U$2.B

## Text on the board
tPlace: Requires conformal coating